# EAGLE board powerboard_v1.1 (EAGLE 7.2.0)
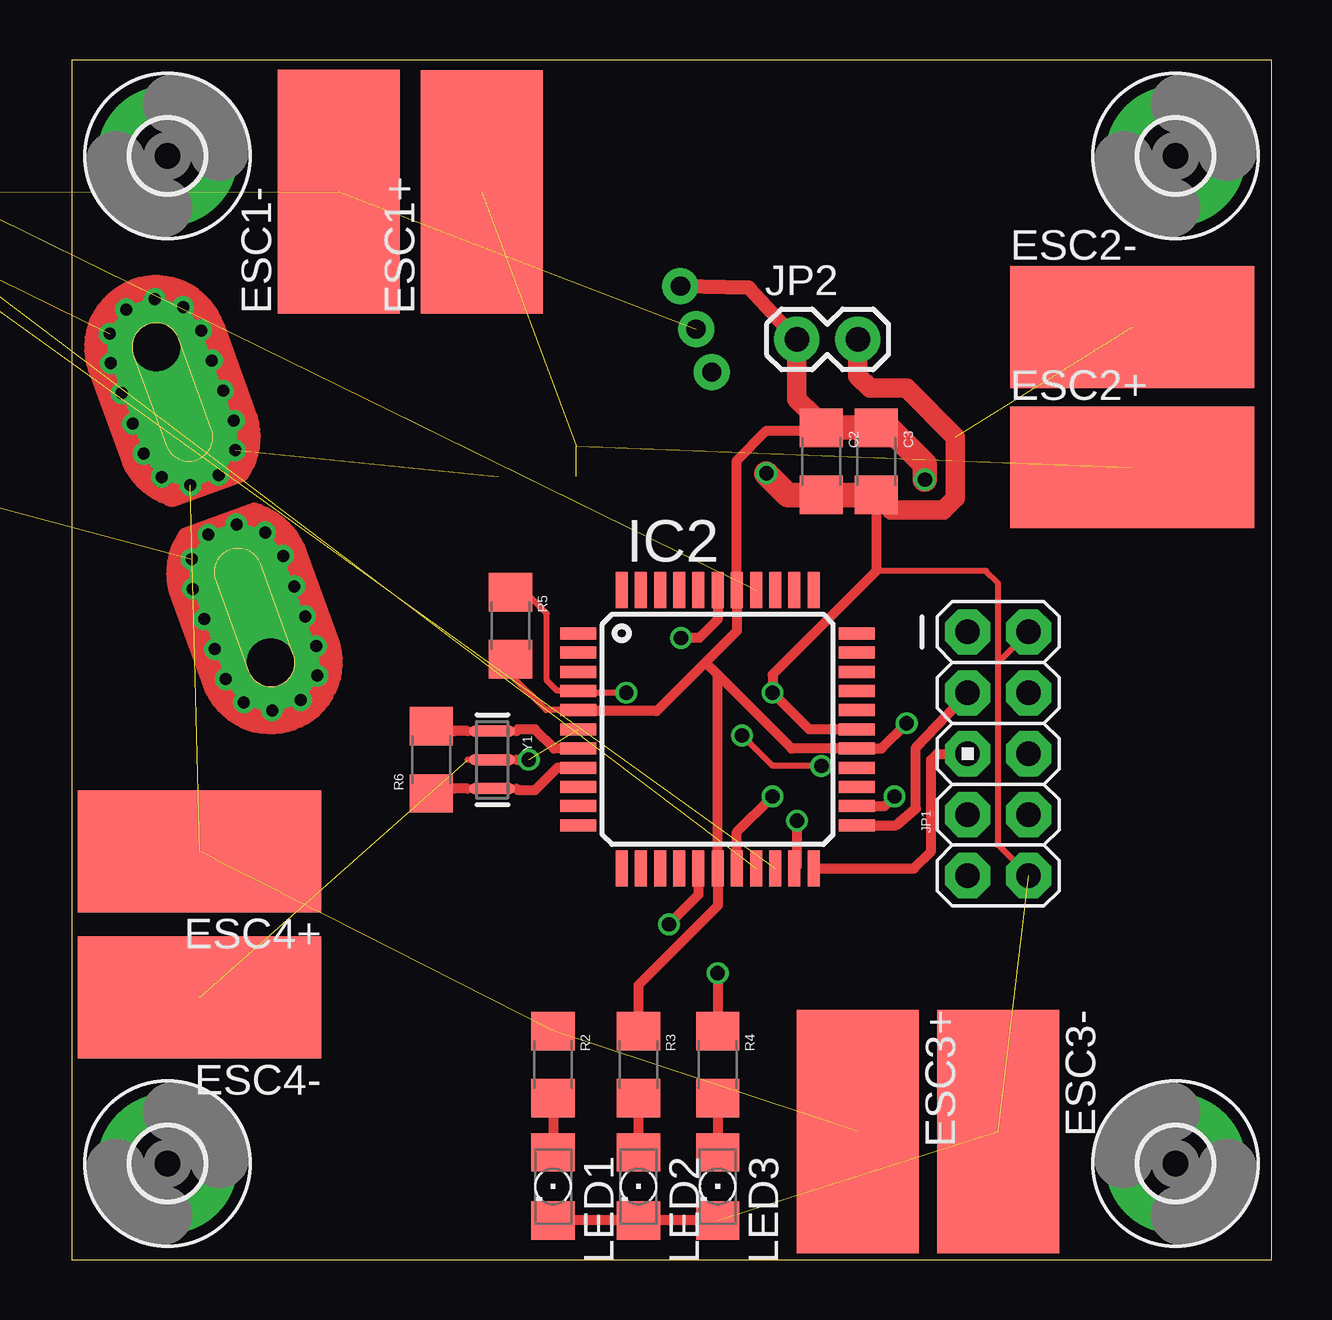
[diagram p0: board, top side]
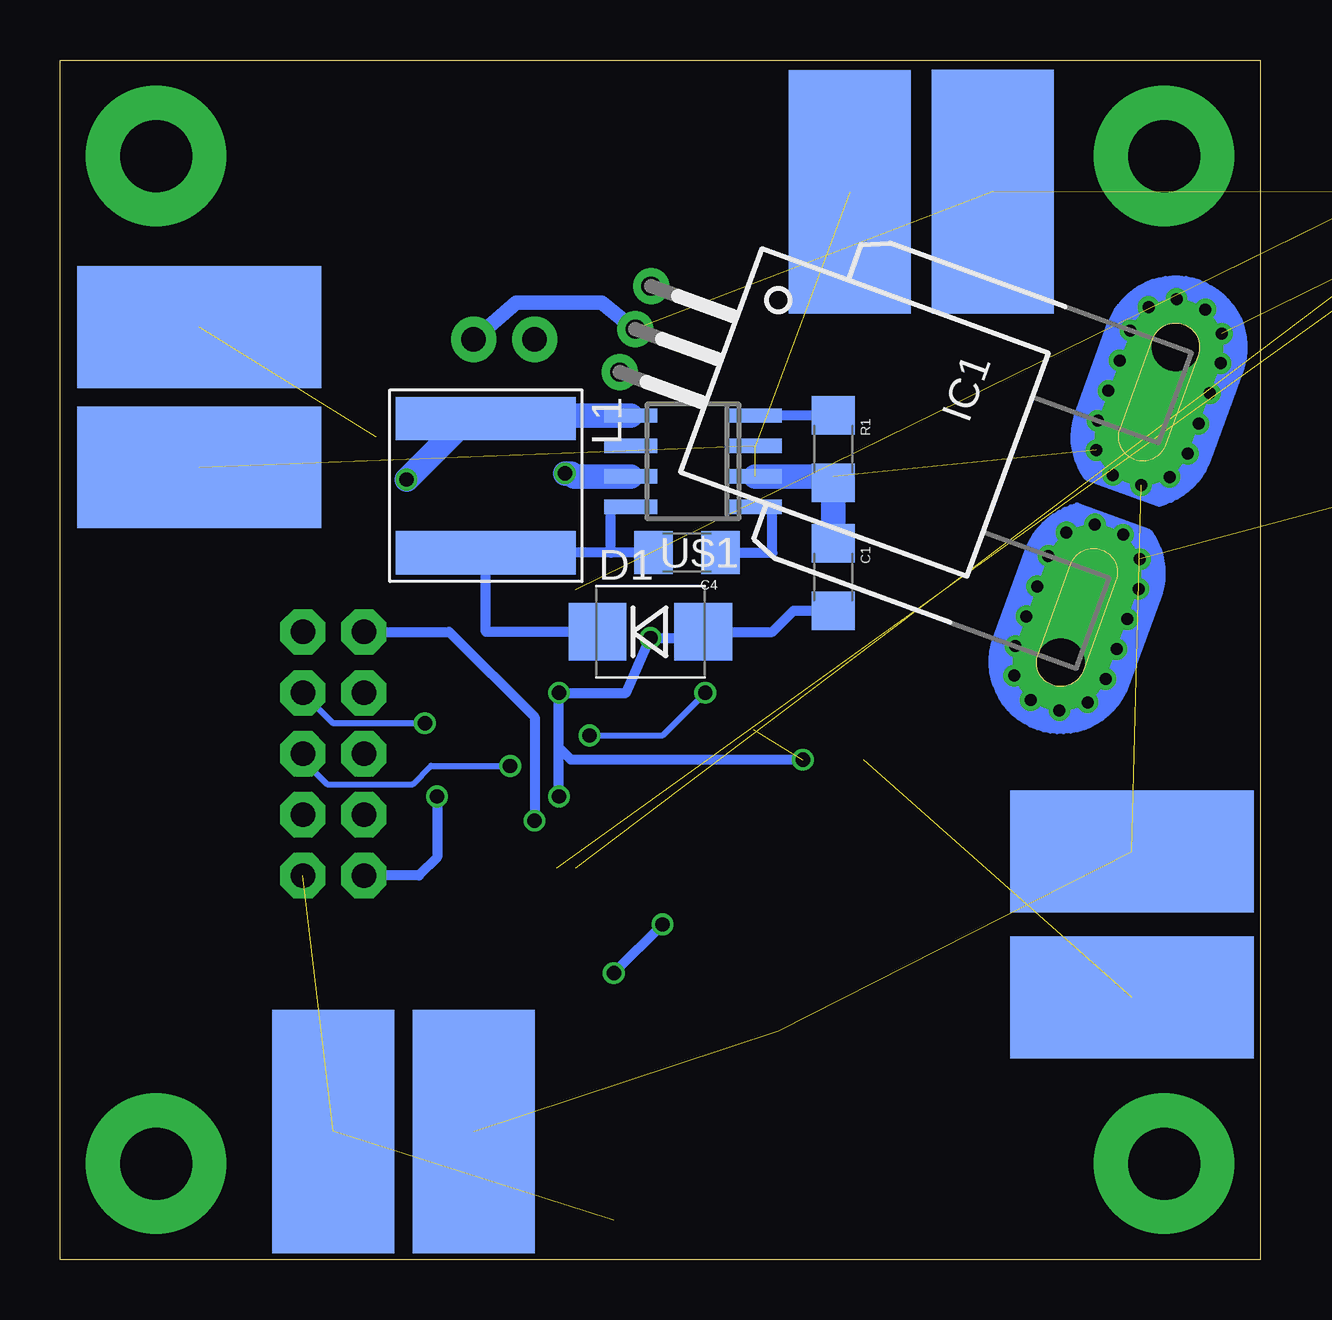
[diagram p1: board, bottom side, seen from below]

Size 50 x 50 mm. Coordinates in mm from the lower left corner, seen from the top.
Outline: 0,0 50,0 50,50 0,50 0,0
Copper layers (1*2*15*16): Top 0.035mm / dielectric 0.2mm / layer 2 0.0175mm / dielectric 1.1mm / layer 15 0.0175mm / dielectric 0.2mm / Bottom 0.035mm
Design rules "SeeedStudio_DRU_no_angle_20130527 *": minimum track width 6mil, minimum drill 12mil, track to track 6mil, track to pad 6mil, pad to pad 6mil, via to via 6mil, smd to smd 0mil, copper to edge 10mil, drill to drill 10mil, minimum pad ring 6mil, minimum via ring 6mil, stop-mask expansion 2mil, vias tented up to drill 25mil, thermal gap 10mil

## Footprints (pad centres in the part's own frame; a part is rotated, then mirrored left to right if it is on the bottom)
5/2 = drill 2 pad 7: P$1 0,0
1206 = smd 1.6 x 1.8: 1 -1.4,0; 2 1.4,0
SMB-DIODE = smd 2.4 x 2.4: A 2.2,0; C -2.2,0
SMD5.08-10.16 = smd 5.08 x 10.16 bottom: P$1 0,0 | smd 5.08 x 10.16: P$2 0,0
3,0-PAD = drill 3 pad 5.842: B3,0 0,0
CB-PFF = drill 0.8 pad 1.5: 1 -1.91,-21.4; 2 0,-21.4; 3 1.91,-21.4 | drill 2 pad 4 offset: IP+ 7,0; IP- -7,0 | drill 0.5 pad 0.9: IP+@2 8.89,0.635; IP+@3 8.89,-0.635; IP+@4 8.175,-1.625; IP+@5 7,-2; IP+@6 5.675,-2; IP+@7 4.35,-2; IP+@8 3,-2; IP+@9 1.825,-1.625; IP+@10 1.1,-0.625; IP+@11 1.1,0.625; IP+@12 1.825,1.625; IP+@13 3,2; IP+@14 4.35,2; IP+@15 5.675,2; IP+@16 7,2; IP+@17 8.175,1.625; IP-@2 -8.89,0.635; IP-@3 -8.89,-0.635; IP-@4 -8.175,-1.625; IP-@5 -7,-2; IP-@6 -5.675,-2; IP-@7 -4.325,-2; IP-@8 -3,-2; IP-@9 -1.825,-1.625; IP-@10 -1.1,-0.625; IP-@11 -1.1,0.625; IP-@12 -1.825,1.625; IP-@13 -3,2; IP-@14 -4.325,2; IP-@15 -5.675,2; IP-@16 -7,2; IP-@17 -8.175,1.625
TQFP44 = smd 1.5 x 0.5: 1 -5.8,4; 2 -5.8,3.2; 3 -5.8,2.4; 4 -5.8,1.6; 5 -5.8,0.8; 6 -5.8,0; 7 -5.8,-0.8; 8 -5.8,-1.6; 9 -5.8,-2.4; 10 -5.8,-3.2; 11 -5.8,-4; 23 5.8,-4; 24 5.8,-3.2; 25 5.8,-2.4; 26 5.8,-1.6; 27 5.8,-0.8; 28 5.8,0; 29 5.8,0.8; 30 5.8,1.6; 31 5.8,2.4; 32 5.8,3.2; 33 5.8,4 | smd 0.5 x 1.5: 12 -4,-5.8; 13 -3.2,-5.8; 14 -2.4,-5.8; 15 -1.6,-5.8; 16 -0.8,-5.8; 17 0,-5.8; 18 0.8,-5.8; 19 1.6,-5.8; 20 2.4,-5.8; 21 3.2,-5.8; 22 4,-5.8; 34 4,5.8; 35 3.2,5.8; 36 2.4,5.8; 37 1.6,5.8; 38 0.8,5.8; 39 0,5.8; 40 -0.8,5.8; 41 -1.6,5.8; 42 -2.4,5.8; 43 -3.2,5.8; 44 -4,5.8
AVR_ICSP = drill 1.016 pad 1.88 octagon: 1 -1.27,5.08; 2 1.27,5.08; 3 -1.27,2.54; 4 1.27,2.54; 5 -1.27,0; 6 1.27,0; 7 -1.27,-2.54; 8 1.27,-2.54; 9 -1.27,-5.08; 10 1.27,-5.08
1X02 = drill 1.016 pad 1.88: 1 0,0; 2 2.54,0
NRS8030 = smd 1.8 x 7.5: P$1 2.8,0; P$2 -2.8,0
LED_1206 = smd 1.6 x 1.803: A -1.422,0; C 1.422,0
SO8 = smd 0.6 x 2.2: 1 -1.905,-2.6; 2 -0.635,-2.6; 3 0.635,-2.6; 4 1.905,-2.6; 5 1.905,2.6; 6 0.635,2.6; 7 -0.635,2.6; 8 -1.905,2.6
RESONATOR-SMD = smd 0.45 x 1.905: 1 -1.2,0; 2 0,0; 3 1.2,0

## Placement (x,y rotation side)
BAT+  5/2  [5/2]  -52.07,44.45 0 top  (outside the outline)
BAT-  5/2  [5/2]  -60.96,44.45 0 top  (outside the outline)
C1  10µ  [1206]  17.78,28.45 270 bottom
C2  22µ/16V  [1206]  31.24,33.27 270 top
C3  22µ/16V  [1206]  33.53,33.27 270 top
C4  0.1µ  [1206]  23.88,29.46 180 bottom
D1  B330B  [SMB-DIODE]  25.4,26.16 0 bottom
ESC1+  SMD10  [SMD5.08-10.16]  17.1,44.5 0 top
ESC1-  SMD10  [SMD5.08-10.16]  11.13,44.5 0 top
ESC2+  SMD10  [SMD5.08-10.16]  44.2,33.02 270 top
ESC2-  SMD10  [SMD5.08-10.16]  44.2,38.86 270 top
ESC3+  SMD10  [SMD5.08-10.16]  32.77,5.33 180 top
ESC3-  SMD10  [SMD5.08-10.16]  38.61,5.33 180 top
ESC4+  SMD10  [SMD5.08-10.16]  5.33,17.02 90 top
ESC4-  SMD10  [SMD5.08-10.16]  5.33,10.92 90 top
H1  MOUNT-PAD-ROUND3.0  [3,0-PAD]  4,46 0 top
H2  MOUNT-PAD-ROUND3.0  [3,0-PAD]  46,46 0 top
H3  MOUNT-PAD-ROUND3.0  [3,0-PAD]  4,4 0 top
H4  MOUNT-PAD-ROUND3.0  [3,0-PAD]  46,4 90 top
IC1  ACS756LCB-100B-PFF-T  [CB-PFF]  5.91,31.46 250 bottom
IC2  ATMEGA644-A  [TQFP44]  26.92,22.1 0 top
JP1  JTAG_CONNPTH  [AVR_ICSP]  38.61,21.08 0 top
JP2  M02PTH  [1X02]  30.23,38.35 0 top
JP3  M02PTH  [1X02]  -38.1,64.77 0 top  (outside the outline)
L1  NRS8030T100  [NRS8030]  32.26,32.26 270 bottom
LED1  RED  [LED_1206]  20.07,3.05 270 top
LED2  RED  [LED_1206]  23.62,3.05 270 top
LED3  RED  [LED_1206]  26.92,3.05 270 top
PLC1  SKIPPY-PLC-10MMPLC  [SKIPPY-PLC-10MM]  -63.5,53.34 0 top  (outside the outline)
R1  100k  [1206]  17.78,33.78 270 bottom
R2  100k  [1206]  20.07,8.13 270 top
R3  100k  [1206]  23.62,8.13 270 top
R4  100k  [1206]  26.92,8.13 270 top
R5  10k  [1206]  18.29,26.42 270 top
R6  1M  [1206]  14.99,20.83 90 top
R7  10k  [1206]  -60.96,71.12 0 top  (outside the outline)
R8  50k  [1206]  -66.04,71.12 0 top  (outside the outline)
U$1  AD2302ARDZ-3.3  [SO8]  23.62,33.27 90 bottom
Y1  10MHZ  [RESONATOR-SMD]  17.53,20.83 270 top

## Library data of the parts
BAT+ BAT- ESC1+ ESC1- ESC2+ ESC2- ESC3+ ESC3- ESC4+ ESC4- JP1 = connectors
C1-C4 = SparkFun-Capacitors
D1 = SparkFun-DiscreteSemi; PROD_ID: DIO-09646
H1-H4 = holes
IC1 = allegro; MPN: ACS758LCB-100B-PFF-T; OC_FARNELL: 1718998; OC_NEWARK: 04R7132
IC2 = atmega; OC_FARNELL: unknown; OC_NEWARK: unknown
JP2 JP3 = SparkFun-Connectors
L1 = inductors
LED1-LED3 = eagle-ltspice; SPICEMODEL: NONE; SPICEPREFIX: D; SPICETYPE: diode
PLC1 = skippy-logo
R1-R8 = SparkFun-Passives
U$1 = dcdcconv
Y1 = SparkFun-FreqCtrl; PROD_ID: XTAL-08895

## Nets
3.3V: C2.1 C3.1 IC1.1 IC2.5 IC2.17 IC2.27 IC2.38 JP1.4 JP2.1 L1.P$2 R3.1 R5.2 U$1.5
GND: BAT-.P$1 C1.2 C2.2 C3.2 D1.A ESC1-.P$1 ESC1-.P$2 ESC2-.P$1 ESC2-.P$2 ESC3-.P$1 ESC3-.P$2 ESC4-.P$1 ESC4-.P$2 IC1.2 IC2.6 IC2.18 IC2.28 IC2.39 JP1.2 JP1.10 JP2.2 LED1.C LED2.C LED3.C R7.1 U$1.7 Y1.2
LO_BATT_LED: IC2.16 R4.1
N$1: BAT+.P$1 IC1.IP+ IC1.IP+@2 IC1.IP+@3 IC1.IP+@4 IC1.IP+@5 IC1.IP+@6 IC1.IP+@7 IC1.IP+@8 IC1.IP+@9 IC1.IP+@10 IC1.IP+@11 IC1.IP+@12 IC1.IP+@13 IC1.IP+@14 IC1.IP+@15 IC1.IP+@16 IC1.IP+@17
N$2: C4.2 D1.C L1.P$1 U$1.8
N$3: R1.1 U$1.4
N$4: LED1.A R2.2
N$5: C4.1 U$1.1
N$6: LED2.A R3.2
N$7: LED3.A R4.2
N$8: IC2.7 R6.2 Y1.1
N$9: IC2.8 R6.1 Y1.3
N$10: IC2.37 R7.2 R8.1
NSRST: IC2.4 JP1.6 R5.1
SCL: IC2.19 JP3.2
SDA: IC2.20 JP3.1
TCK: IC2.21 JP1.1
TDI: IC2.24 JP1.9
TDO: IC2.23 JP1.3
TMS: IC2.22 JP1.5
V_BATT: C1.1 ESC1+.P$1 ESC1+.P$2 ESC2+.P$1 ESC2+.P$2 ESC3+.P$1 ESC3+.P$2 ESC4+.P$1 ESC4+.P$2 IC1.IP- IC1.IP-@2 IC1.IP-@3 IC1.IP-@4 IC1.IP-@5 IC1.IP-@6 IC1.IP-@7 IC1.IP-@8 IC1.IP-@9 IC1.IP-@10 IC1.IP-@11 IC1.IP-@12 IC1.IP-@13 IC1.IP-@14 IC1.IP-@15 IC1.IP-@16 IC1.IP-@17 R1.2 R2.1 R8.2 U$1.2 U$1.3

## Tracks (layer width: path | path; a pad name or v marks a point on that pad's centre or on a via)
3.3V  (via drill 0.6)
  Top 0.254: IC2.5 19.77,22.9 18.29,24.38 R5.2
  Top 0.406: 26.42,24.89 27.72,26.2 IC2.38 27.72,33.31 28.96,34.54 31.11,34.54 C2.1 | 26.42,24.89 24.38,22.86 21.16,22.86 IC2.5 | 26.92,24.38 30.01,21.3 IC2.27 33.74,21.3 v34.8,22.35 | 26.92,24.38 26.42,24.89 | 26.92,24.38 IC2.17 26.92,14.73 23.62,11.43 R3.1
  Top 0.61: JP2.1 28.23,40.51 IC1.1
  Top 0.813: JP2.1 30.23,35.87 30.96,35.13 30.96,34.95 C2.1
  Top 1.016: v35.56,32.51 35.56,33.15 34.04,34.67 33.28,34.67 C3.1 C2.1
  Bottom 0.254: v34.8,22.35 38.61,22.35 JP1.4
  Bottom 0.406: 32.26,35.18 L1.P$2
  Bottom 1.016: U$1.5 30.11,35.18 L1.P$2 33.01,35.06 v35.56,32.51
GND  (via drill 0.6)  (12 unrouted)
  Top 0.254: JP1.10 38.61,17.27 38.61,24.89 | 38.61,24.89 JP1.2 | 38.61,24.89 38.61,28.19 38.1,28.7 33.53,28.7
  Top 0.406: IC2.39 26.92,26.67 26.16,25.91 v25.4,25.91 | IC2.28 30.73,22.1 v29.21,23.62 29.21,24.38 33.53,28.7 C3.2 | IC2.18 27.72,17.82 v29.21,19.3 | LED3.C LED2.C LED1.C | 18.54,20.83 v19.05,20.83
  Top 0.813: JP2.2 32.77,36.83 33.27,36.32 34.8,36.32 36.83,34.29 36.83,31.75 36.32,31.24 34.16,31.24 C3.2
  Top 1.016: C3.2 C2.2 29.85,31.87 v28.96,32.77
  Bottom 0.406: C1.2 19.43,27.05 20.32,26.16 D1.A 23.45,25.91 v25.4,25.91 26.42,23.62 v29.21,23.62 29.21,21.34 | v29.21,19.3 29.21,21.34 | v19.05,20.83 28.7,20.83 29.21,21.34
  Bottom 0.61: IC1.2 26.08,38.78 27.43,39.88 30.99,39.88 JP2.2
  Bottom 1.016: v28.96,32.77 28.7,32.77 28.57,32.64 U$1.7
LO_BATT_LED  (via drill 0.6)
  Top 0.406: IC2.16 26.12,15.2 v24.89,13.97 | v26.92,11.94 R4.1
  Bottom 0.406: v24.89,13.97 v26.92,11.94
N$1  (1 unrouted)
N$2
  Bottom 0.406: D1.C 32.26,26.16 L1.P$1 27.05,29.46 | C4.2 27.05,29.46 | 27.05,29.46 27.05,31.37 U$1.8
N$3
  Bottom 0.406: R1.1 U$1.4
N$4
  Top 0.406: R2.2 LED1.A
N$5
  Bottom 0.406: C4.1 20.32,29.46 20.32,31.37 U$1.1
N$6
  Top 0.406: R3.2 LED2.A
N$7
  Top 0.406: R4.2 LED3.A
N$8
  Top 0.406: IC2.7 20.1,21.3 19.3,22.1 18.61,22.1 18.54,22.03 | 16.51,22.03 15.95,22.03 R6.2
N$9
  Top 0.406: 16.51,19.63 15.95,19.63 R6.1 | IC2.8 20.24,20.5 19.3,19.56 18.61,19.56 18.54,19.63
N$10  (2 unrouted)
NSRST  (via drill 0.6)
  Top 0.254: v31.24,20.57 29.21,20.57 v27.94,21.84 | v23.11,23.62 21.2,23.62 IC2.4 20.24,23.7 19.81,24.13 19.81,26.92 19.05,27.69 18.42,27.69 R5.1
  Bottom 0.254: JP1.6 39.88,20.83 38.86,19.81 35.31,19.81 34.54,20.57 v31.24,20.57 31.11,20.57 | v27.94,21.84 24.89,21.84 v23.11,23.62
SCL  (1 unrouted)
SDA  (1 unrouted)
TCK  (via drill 0.6)
  Top 0.406: v30.23,18.29 30.23,16.4 IC2.21
  Bottom 0.406: JP1.1 33.78,26.16 30.23,22.61 v30.23,18.29
TDI  (via drill 0.6)
  Top 0.406: IC2.24 33.88,18.9 v34.29,19.3
  Bottom 0.406: v34.29,19.3 34.29,16.76 35.05,16 JP1.9
TDO
  Top 0.406: IC2.23 34.35,18.1 35.18,18.8 35.18,21.34 JP1.3
TMS
  Top 0.406: IC2.22 35.09,16.3 35.81,17.02 35.81,20.83 36.07,21.08 JP1.5
V_BATT  (12 unrouted)
  Bottom 1.016: U$1.2 17.78,32.64 R1.2 C1.1